# Altium PCB ControlBoard.PcbDoc
Units mil, origin at the board's own origin, x right, y up, seen from the top; angles counter-clockwise.
Board outline 3500 x 3000 mil, 2 copper layers (Top Layer, Bottom Layer); 21 components, 54 nets, 161 pads, 49 vias.
Unrouted connection lines stored in the file: 102.
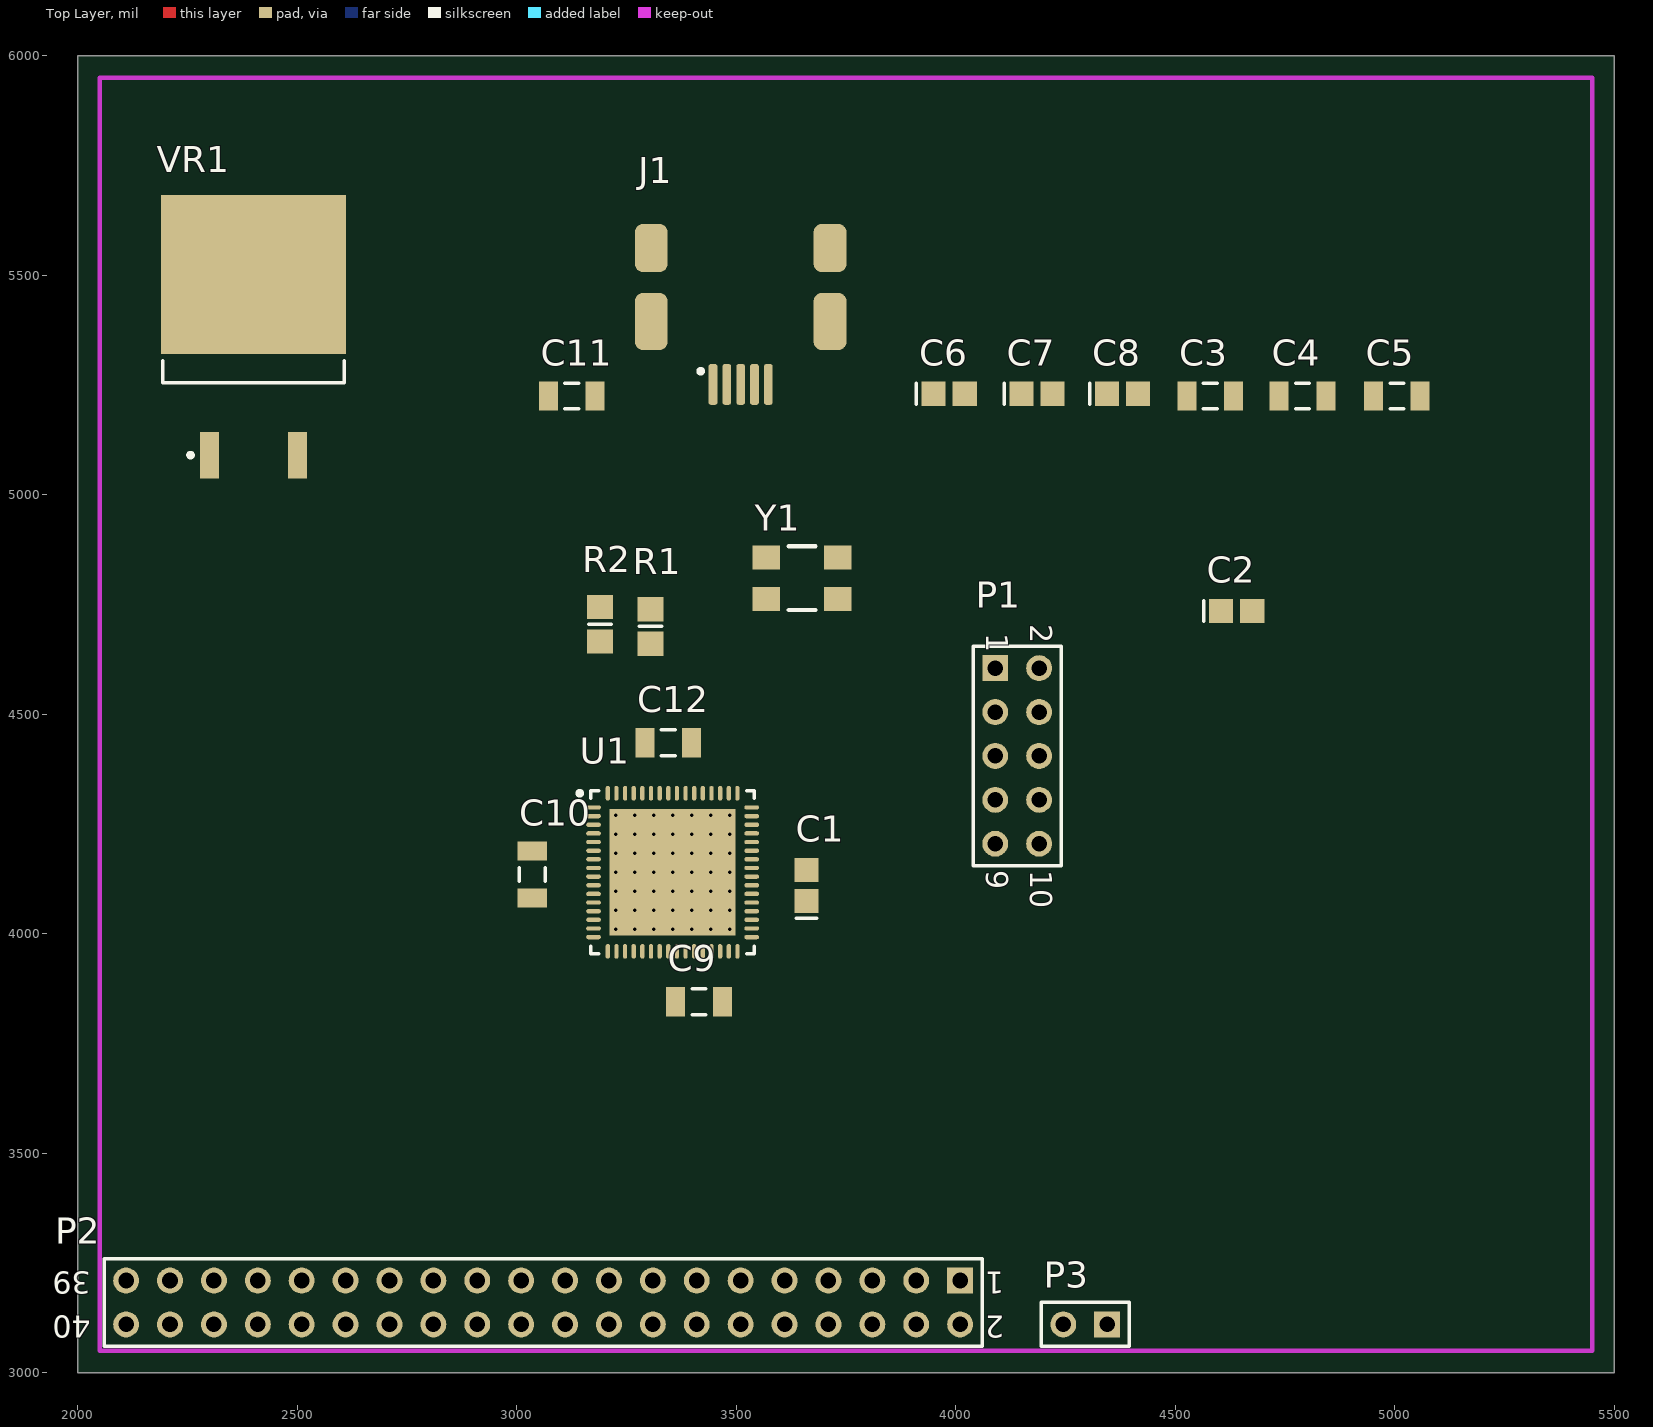
[diagram p0: Top Layer view]
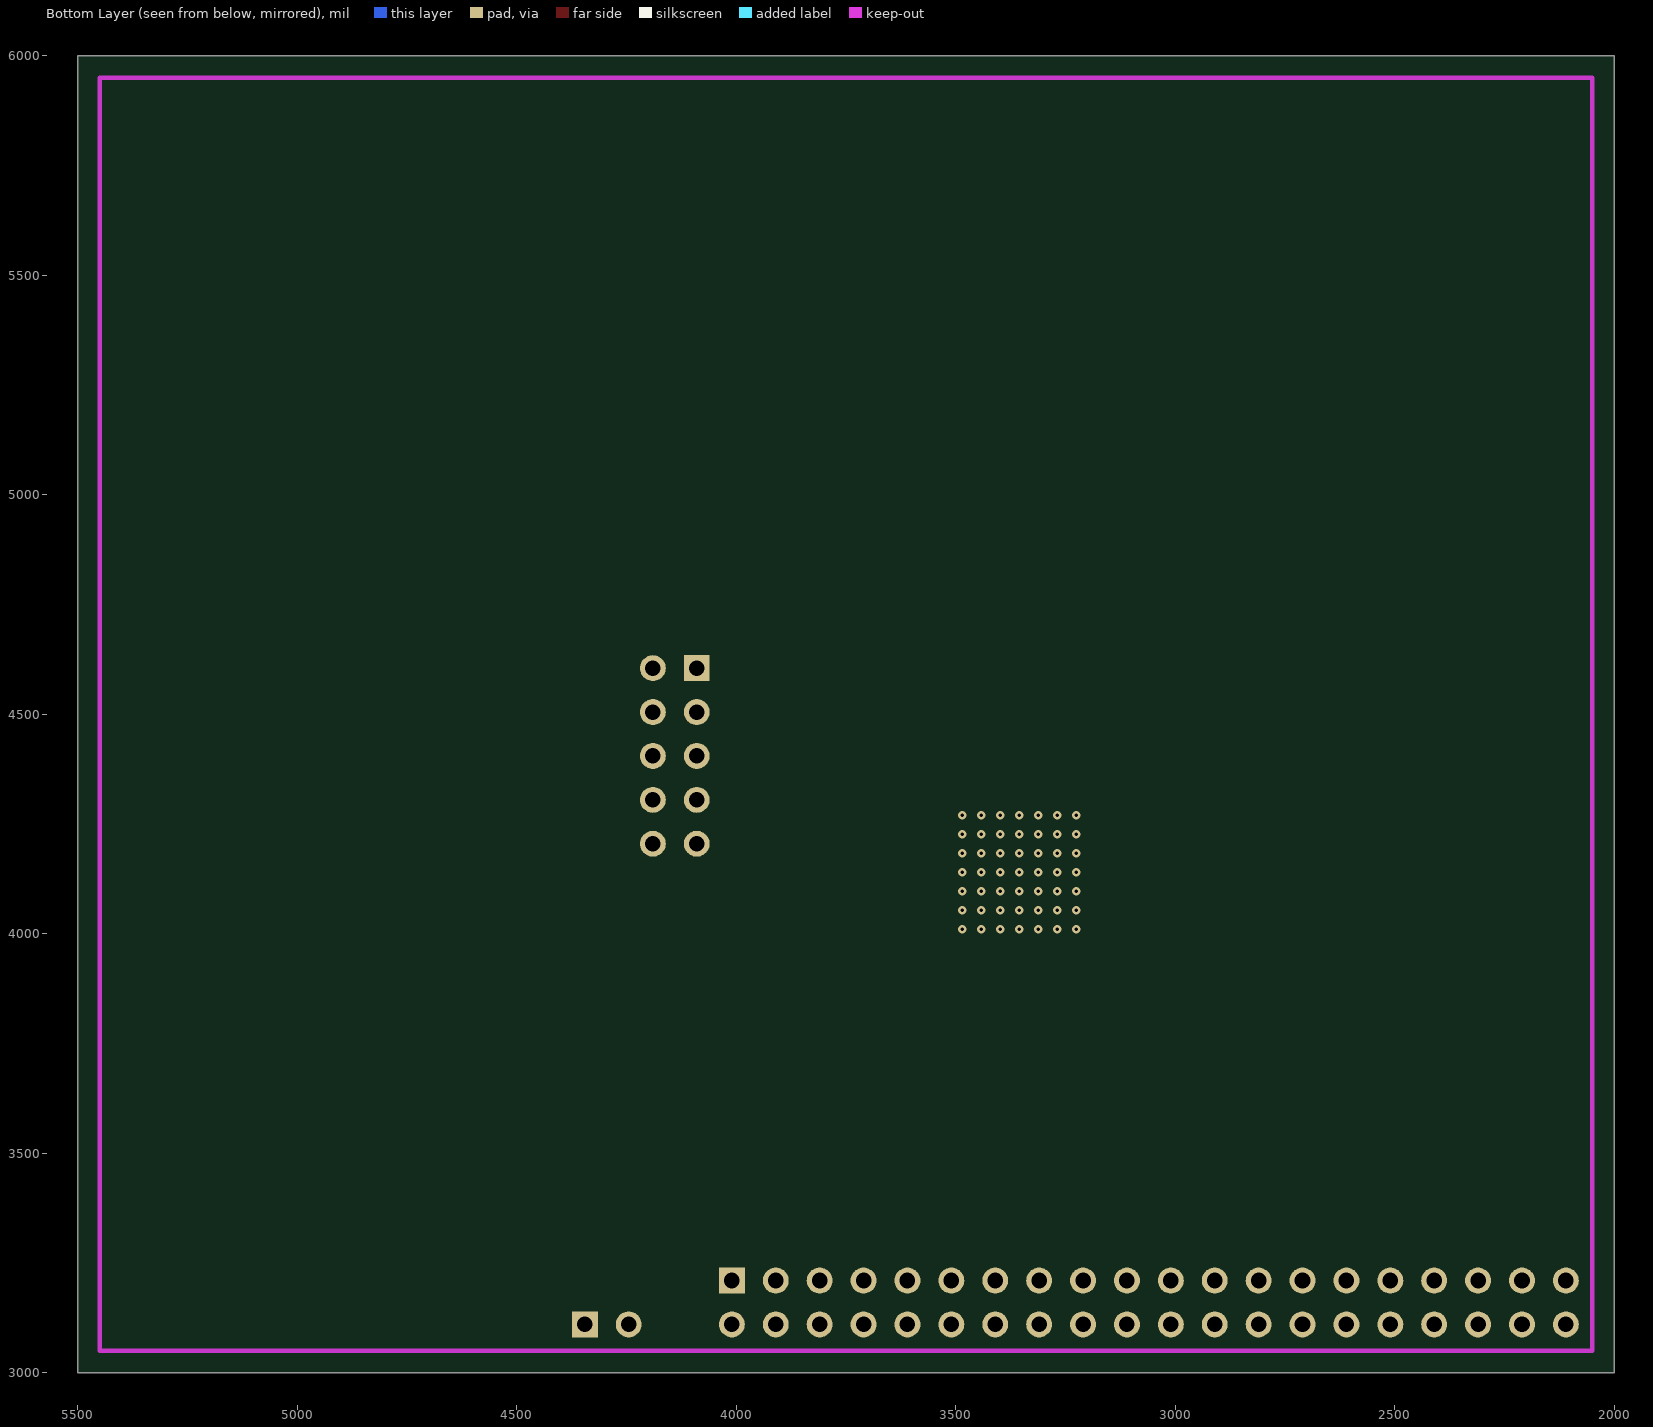
[diagram p1: Bottom Layer view, seen from below]

## Layer stack, top to bottom
Top Solder: solder mask 0.4, Solder Resist, Dk 3.5
Top Layer: signal copper 1.4
Dielectric 1: dielectric 12.6, FR-4, Dk 4.8
Bottom Layer: signal copper 1.4
Bottom Solder: solder mask 0.4, Solder Resist, Dk 3.5

## Board outline
2000,3000 5500,3000 5500,6000 2000,6000

## Design rules (kind name [scope] priority, off if disabled: settings)
Clearance [All] p1: gap=8
PolygonConnect [All] p1: connectstyle=Relief reliefconductorwidth=10 reliefentries=4 polygonreliefangle="90 Angle" airgapwidth=10
RoomDefinition ControlBoard [InComponentClass('ControlBoard')] p1: confinementstyle=ConfineIn formatcopy=TRUE lockcomponents=FALSE outline 5545,3060 10950,3060 10950,5355 5545,5355
RoutingVias [All] p1: holewidth=15 width=25 viastyle="Through Hole" minholewidth=28 minwidth=50 maxholewidth=28 maxwidth=50
SolderMaskExpansion [All] p1: expansion=4
Width [All] p1: maxlimit=8 minlimit=8 preferedwidth=8
30 further rules are at their usual default settings.

## Components (designator, comment, footprint, x,y, rotation, side; value= is the part's Value field where it differs from the comment)
C1 "Cap Semi" C2512 3660,4110 r90 top
C2 "Cap Semi" C2512 4640,4735 r0 top
C3 "Cap Semi" C1206 4580,5225 r0 top
C4 "Cap Semi" C1206 4790,5225 r0 top
C5 "Cap Semi" C1206 5005,5225 r0 top
C6 "Cap Semi" C2512 3985,5230 r0 top
C7 "Cap Semi" C2512 4185,5230 r0 top
C8 "Cap Semi" C2512 4380,5230 r0 top
C9 "Cap Semi" C1206 3415,3845 r180 top
C10 "Cap Semi" C1206 3035,4135 r90 top
C11 "Cap Semi" C1206 3125,5225 r0 top
C12 "Cap Semi" C1206 3345,4435 r0 top
J1 "10057202-R00LF" FCI-10057202-R00LF_V 3510,5410 r90 top
P1 "Header 5X2" HDR2X5 4090,4605 r270 top
P2 "Header 20X2" HDR2X20 4010,3210 r180 top
P3 "Header 2" HDR1X2 4345,3110 r180 top
R1 "Res1" 6-0805_M 3305,4700 r90 top
R2 "Res1" 6-0805_M 3190,4705 r90 top
U1 "ATSAM3S1BA-MU" QFN64_M 3355,4140 r0 top
VR1 "Volt Reg" D2PAK_M 2400,5360 r90 top
Y1 "FQ5032B-12" FOX-FQ5032B_V 3650,4810 r0 top

## Footprints (in the part's own frame and the unit in brackets; to place one, negate y for a bottom-side part, rotate by r counter-clockwise, add the part's x,y. Pads: shape width x height; smd on the part's side, far side on the other; paste and mask are expansions set on the pad)
6-0805_M [mm] "Chip Resistor, Body 2.0x1.2mm, IPC Low Density"
  rect 1.4x1.5 smd: 1(-1,0) 2(1,0)
  silkscreen extent 0,-0.65 0,0.65, body extent -1.07,-0.7 1.07,0.7, height 0.7
C1206 [mm] "Chip Capacitor, Body 3.2x1.6mm, IPC High Density"
  rect 1.1x1.7 smd: 1(-1.35,0) 2(1.35,0)
  silkscreen extent -0.4,-0.75 0.4,0.75, body extent -1.7,-0.9 1.7,0.9, height 1.3
C2512 [mm] "Chip Capacitor, Body 2.54x1.27mm, IPC High Density"
  rect 1.4x1.4 smd: 1(-0.9,0) 2(0.9,0)
  silkscreen extent -1.9,-0.6 -1.9,0.6, body extent -1.45,-0.82 1.45,0.82, height 1.3
D2PAK_M [mm] "D2-PAK, 4-Leads, Body 8.8x10.4mm, Pitch 2.54mm, Lead Span 15.1mm, IPC Low Density"
  rect 2.7x1.1 smd: 1(-6.85,2.54) 3(-6.85,-2.54)
  rect 9.2x10.7 smd: 2(3.6,0)
  silkscreen extent -6.97,-5.25 -1.4,5.25, body extent -2.65,-5.28 6.35,5.28, height 4.69
FCI-10057202-R00LF_V [mm] "Connector, USB Mini-B, Sinking Type, SMT, 5 Position, Right Angle"
  rrect50% 2.35x0.5 smd paste+0.038 mask+0.038: 1(-4.03,1.6) 2(-4.03,0.8) 3(-4.03,0)
  rrect50% 2.35x0.5 smd paste+0.038 mask+0: 4(-4.03,-0.8) 5(-4.03,-1.6)
  rrect50% 3.302x1.905 smd paste+0.038 mask+0: 6(-0.387,-5.175) 8(-0.387,5.175)
  rrect50% 2.794x1.905 smd paste+0.038 mask+0: 7(3.863,-5.175) 9(3.863,5.175)
  silkscreen extent -3.39,2.19 -3.14,2.44, body extent -4.21,-5.9 6.86,5.9, height 1.41
FOX-FQ5032B_V [mil] "SMT Crystal, 4-Leads, Body 5.2x3.4mm"
  rect 63x55 smd: 1(-81.5,-47.5) 2(81.5,-47.5) 3(81.5,47.5) 4(-81.5,47.5)
  silkscreen extent -30,-72 30,72, body extent -114,-52 113,51, height 47
HDR1X2 [mm] "Connector; Header; 2 Position"
  rect 1.5x1.5 hole 0.9: 1(0,0)
  round 1.5 hole 0.9: 2(2.54,0)
  silkscreen extent -1.27,-1.27 3.81,1.27
HDR2X5 [mm] "Connector; Header; 5x2 Position"
  rect 1.5x1.5 hole 0.9: 1(0,0)
  round 1.5 hole 0.9: 2(0,2.54) 3(2.54,0) 4(2.54,2.54) 5(5.08,0) 6(5.08,2.54) 7(7.62,0) 8(7.62,2.54) 9(10.16,0) 10(10.16,2.54)
  silkscreen extent -1.27,-1.27 11.43,3.81
HDR2X20 [mm] "Connector; Header; 20x2 Position"
  rect 1.5x1.5 hole 0.9: 1(0,0)
  round 1.5 hole 0.9: 2(0,2.54) 3(2.54,0) 4(2.54,2.54) 5(5.08,0) 6(5.08,2.54) 7(7.62,0) 8(7.62,2.54) 9(10.16,0) 10(10.16,2.54) 11(12.7,0) 12(12.7,2.54) 13(15.24,0) 14(15.24,2.54) 15(17.78,0) 16(17.78,2.54) 17(20.32,0) 18(20.32,2.54) 19(22.86,0) 20(22.86,2.54) 21(25.4,0) 22(25.4,2.54) 23(27.94,0) 24(27.94,2.54) 25(30.48,0) 26(30.48,2.54) 27(33.02,0) 28(33.02,2.54) 29(35.56,0) 30(35.56,2.54) 31(38.1,0) 32(38.1,2.54) 33(40.64,0) 34(40.64,2.54) 35(43.18,0) 36(43.18,2.54) 37(45.72,0) 38(45.72,2.54) 39(48.26,0) 40(48.26,2.54)
  silkscreen extent -1.27,-1.27 49.53,3.81
QFN64_M [mm] "QFN, 64-Leads, Body 9x9mm, Pitch 0.5mm, Thermal Pad 7.3x7.3mm, IPC Low Density"
  oval 0.85x0.25 smd: 1(-4.575,3.75) 2(-4.575,3.25) 3(-4.575,2.75) 4(-4.575,2.25) 5(-4.575,1.75) 6(-4.575,1.25) 7(-4.575,0.75) 8(-4.575,0.25) 9(-4.575,-0.25) 10(-4.575,-0.75) 11(-4.575,-1.25) 12(-4.575,-1.75) 13(-4.575,-2.25) 14(-4.575,-2.75) 15(-4.575,-3.25) 16(-4.575,-3.75) 33(4.575,-3.75) 34(4.575,-3.25) 35(4.575,-2.75) 36(4.575,-2.25) 37(4.575,-1.75) 38(4.575,-1.25) 39(4.575,-0.75) 40(4.575,-0.25) 41(4.575,0.25) 42(4.575,0.75) 43(4.575,1.25) 44(4.575,1.75) 45(4.575,2.25) 46(4.575,2.75) 47(4.575,3.25) 48(4.575,3.75)
  oval 0.25x0.85 smd: 17(-3.75,-4.575) 18(-3.25,-4.575) 19(-2.75,-4.575) 20(-2.25,-4.575) 21(-1.75,-4.575) 22(-1.25,-4.575) 23(-0.75,-4.575) 24(-0.25,-4.575) 25(0.25,-4.575) 26(0.75,-4.575) 27(1.25,-4.575) 28(1.75,-4.575) 29(2.25,-4.575) 30(2.75,-4.575) 31(3.25,-4.575) 32(3.75,-4.575) 49(3.75,4.575) 50(3.25,4.575) 51(2.75,4.575) 52(2.25,4.575) 53(1.75,4.575) 54(1.25,4.575) 55(0.75,4.575) 56(0.25,4.575) 57(-0.25,4.575) 58(-0.75,4.575) 59(-1.25,4.575) 60(-1.75,4.575) 61(-2.25,4.575) 62(-2.75,4.575) 63(-3.25,4.575) 64(-3.75,4.575)
  rect 7.3x7.3 smd: 65(0,0)
  silkscreen extent -5.5,-4.72 4.72,4.72, body extent -4.57,-4.57 4.57,4.57, height 1

## Part data
C1 C2 C3 C4 C5 C6 C7 C8 C9 C10 C11 C12: "Capacitor (Semiconductor SIM Model)"
J1: library part CMP-0397-00001-1, "Connector Mini USB, Right Angle, Receptacle, Type B"
P1: "Header, 5-Pin, Dual row"
P2: "Header, 20-Pin, Dual row"
P3: "Header, 2-Pin"
R1 R2: "Resistor"
U1: library part CMP-0076-00048-1, "AT91 ARM Cortex-M3 32-bit Microcontroller, 64KB Flash, 16KB ROM, 10-ch. ADC, 47 User I/Os, 64-Pin QFN, Industrial Grade (-40°C to 85°C), Pb-Free"
VR1: "Voltage Regulator"
Y1: library part CMP-0399-00001-1, "Crystal, SMD, 12MHz, Stab=30ppm 20.0pF"

## Via types
v1: diameter 19.68, hole 7.87, Top Layer to Bottom Layer, 49 vias

## Nets (pads, with @x,y where several pads share a name; then routed paths per layer and width w, separated by ;. In a path a pad name is that pad's centre, name@x,y a point inside that pad or via, vN(x,y) a via of type N, cw(c..) or ccw(c..) an arc to the next point about the centre after c; other vN are vias at no path point)
GND: C1.1 C2.1 C3.1 C4.1 C5.1 C6.1 C7.1 C8.1 C9.1 C10.1 C11.1 C12.1 J1.5 J1.6 J1.7 J1.8 J1.9 P1.3 P1.5 P1.9 P3.1 P3.2 U1.2 U1.17 U1.46 U1.60 U1.65 VR1.2 Y1.2 Y1.4
  other v1: 3225.08,4010.08 3268.39,4010.08 3311.69,4010.08 3355,4010.08 3398.31,4010.08 3441.61,4010.08 3484.92,4010.08 3225.08,4053.39 3268.39,4053.39 3311.69,4053.39 3355,4053.39 3398.31,4053.39 3441.61,4053.39 3484.92,4053.39 3225.08,4096.69 3268.39,4096.69 3311.69,4096.69 3355,4096.69 3398.31,4096.69 3441.61,4096.69 3484.92,4096.69 3225.08,4140 3268.39,4140 3311.69,4140 3355,4140 3398.31,4140 3441.61,4140 3484.92,4140 3225.08,4183.31 3268.39,4183.31 3311.69,4183.31 3355,4183.31 3398.31,4183.31 3441.61,4183.31 3484.92,4183.31 3225.08,4226.61 3268.39,4226.61 3311.69,4226.61 3355,4226.61 3398.31,4226.61 3441.61,4226.61 3484.92,4226.61 3225.08,4269.92 3268.39,4269.92 3311.69,4269.92 3355,4269.92 3398.31,4269.92 3441.61,4269.92 3484.92,4269.92
NetC1_2: C1.2 R2.2 Y1.1
NetC2_2: C2.2 R1.2 Y1.3
NetJ1_2: J1.2 U1.56
NetJ1_3: J1.3 U1.57
NetR1_1: R1.1 U1.61
NetR2_1: R2.1 U1.62
NSRST: P1.10 U1.39
PA0: P2.1 U1.48
PA1: P2.2 U1.47
PA2: P2.3 U1.44
PA3: P2.4 U1.43
PA4: P2.5 U1.36
PA5: P2.6 U1.35
PA6: P2.7 U1.34
PA7: P2.8 U1.32
PA8: P2.9 U1.31
PA9: P2.10 U1.30
PA10: P2.11 U1.29
PA11: P2.12 U1.28
PA12: P2.13 U1.27
PA13: P2.14 U1.22
PA14: P2.15 U1.21
PA15: P2.16 U1.20
PA16: P2.17 U1.19
PA17: P2.18 U1.9
PA18: P2.19 U1.10
PA19: P2.20 U1.13
PA20: P2.21 U1.16
PA21: P2.22 U1.11
PA22: P2.23 U1.14
PA23: P2.24 U1.15
PA24: P2.25 U1.23
PA25: P2.26 U1.25
PA26: P2.27 U1.26
PA27: P2.28 U1.37
PA28: P2.29 U1.38
PA29: P2.30 U1.41
PA30: P2.31 U1.42
PA31: P2.32 U1.52
PB0: P2.33 U1.3
PB1: P2.34 U1.4
PB2: P2.35 U1.5
PB3: P2.36 U1.6
PB4: P2.37 U1.33
PB12: P2.38 U1.55
PB13: P2.39 U1.59
PB14: P2.40 U1.63
SWDCLK: P1.4 U1.53
SWDIO: P1.2 U1.51
SWO: P1.6 U1.49
V3.3: C3.2 C4.2 C5.2 C7.2 C8.2 P1.1 U1.1 U1.7 U1.18 U1.45 U1.58 VR1.3
VCC: C6.2 J1.1 VR1.1
VDDOUT: C9.2 C10.2 C11.2 C12.2 U1.8 U1.12 U1.24 U1.54 U1.64
pads on no net: J1.4 P1.7 P1.8 U1.40 U1.50

## Keep-outs
Keep-Out Layer:
  lines w10: 2050,3050 2050,5950 5450,5950 5450,3050 2050,3050

## Silkscreen, mask and mechanical layers (free items; w line width, h text height)
Drill Drawing:
  text ".LEGEND" at 5700,3200 h60
  text "Drill Drawing." at 5700,3100 h60

## Dimensions
2050,3050 to 2050,5950 on Mechanical 1
2050,3050 to 5450,3050 on Mechanical 1

## Text inside footprints (layer, text, board x,y; h text height)
P1: Top Overlay "10" at 4170,4145 h50 r270; Top Overlay "9" at 4070,4145 h50 r270; Top Overlay "1" at 4070,4685 h50 r270; Top Overlay "2" at 4170,4705 h50 r270
P2: Top Overlay "1" at 4110,3230 h50 r180; Top Overlay "2" at 4110,3130 h50 r180; Top Overlay "40" at 2030,3130 h50 r180; Top Overlay "39" at 2030,3230 h50 r180